# EAGLE board Circuit (EAGLE 9.7.0)

Size 84.78 x 68.82 mm. Coordinates in mm from the lower left corner, seen from the top.
Outline: 0,0 84.78,0 84.78,68.82 0,68.82 0,0
Copper layers (1*16): Top 0.035mm / dielectric 1.5mm / Bottom 0.035mm
Design rules "default": minimum track width 6mil, minimum drill 0.35mm, track to track 6mil, track to pad 6mil, pad to pad 6mil, via to via 6mil, smd to smd 6mil, copper to edge 40mil, drill to drill 6mil, minimum pad ring 10mil, minimum via ring 8mil, stop-mask expansion 4mil, vias tented up to drill 0mil, thermal gap 10mil

## Footprints (pad centres in the part's own frame; a part is rotated, then mirrored left to right if it is on the bottom)
LEDRD254W60D565H860B = drill 0.981 pad 1.581: 1 -1.27,0; 2 1.27,0
BATTERY-GENERIC = drill 1.118 pad 3.15 octagon: + 2.54,0; - -2.54,0
RESAD1016W63L850D250B = drill 0.83 pad 1.43: 1 -5.08,0; 2 5.08,0
78B04ST = drill 0.8: 1 -3.81,-3.81; 2 -1.27,-3.81; 3 1.27,-3.81; 4 3.81,-3.81; 5 3.81,3.81; 6 1.27,3.81; 7 -1.27,3.81; 8 -3.81,3.81
DIP762W53P254L1969H508Q14B = drill 0.743 pad 1.343: 1 -3.81,7.62; 2 -3.81,5.08; 3 -3.81,2.54; 4 -3.81,0; 5 -3.81,-2.54; 6 -3.81,-5.08; 7 -3.81,-7.62; 8 3.81,-7.62; 9 3.81,-5.08; 10 3.81,-2.54; 11 3.81,0; 12 3.81,2.54; 13 3.81,5.08; 14 3.81,7.62

## Placement (x,y rotation side)
D1  RED  [LEDRD254W60D565H860B]  78.72,34.37 180 top
P1  BATTERYGENERIC  [BATTERY-GENERIC]  41.03,60.56 180 top
R1  220  [RESAD1016W63L850D250B]  77.45,47.07 90 top
R2  330  [RESAD1016W63L850D250B]  6.33,8.97 90 top
R3  330  [RESAD1016W63L850D250B]  8.87,8.97 90 top
R4  330  [RESAD1016W63L850D250B]  11.41,8.97 90 top
R5  330  [RESAD1016W63L850D250B]  13.95,8.97 90 top
SW1  SPST-478B04ST  [78B04ST]  10.14,28.02 0 top
U1  74HC04_PDIP  [DIP762W53P254L1969H508Q14B]  26.65,28.02 90 top
U2  74HC08_PDIP  [DIP762W53P254L1969H508Q14B]  46.97,28.02 90 top
U3  74HC32_PDIP  [DIP762W53P254L1969H508Q14B]  67.29,28.02 90 top

## Library data of the parts
D1 = Tinkercad; CATEGORY: Opto-Electronic; SUB-CATEGORY: LED; VALUE: LED_RED
P1 R1-R5 SW1 U1-U3 = Tinkercad

## Nets
D1_C: D1.2 R1.1
P1+: P1.+ R2.1 R3.1 R4.1 R5.1 U1.14 U2.14 U3.14
P1-: P1.- R1.2 U1.7 U2.7 U3.7
SW1_1: R2.2 SW1.1
SW1_2: R3.2 SW1.2
SW1_3: R4.2 SW1.3
SW1_4: R5.2 SW1.4
U1_1A: SW1.8 U1.1
U1_1Y: U1.2 U2.1
U2_1B: SW1.7 U2.2
U2_1Y: U2.3 U3.1
U3_1B: SW1.6 U3.2
U3_1Y: D1.1 U3.3

## Tracks (layer width: path | path; a pad name or v marks a point on that pad's centre or on a via)
D1_C  (1 unrouted)
P1+  (7 unrouted)
P1-  (4 unrouted)
SW1_1  (1 unrouted)
SW1_2  (1 unrouted)
SW1_3  (1 unrouted)
SW1_4  (1 unrouted)
U1_1A  (1 unrouted)
U1_1Y  (1 unrouted)
U2_1B  (1 unrouted)
U2_1Y  (1 unrouted)
U3_1B  (1 unrouted)
U3_1Y  (1 unrouted)